# Altium PCB sband.PcbDoc (part 2 of 2)
Units mil, origin at the board's own origin, x right, y up, seen from the top; angles counter-clockwise.
Board outline 1830 x 2835 mil, 4 copper layers (Top Layer, Int1 (GND), Int2 (PWR), Bottom Layer), stack 53.912 mil thick; 48 components, 82 nets, 253 pads, 143 vias.
Unrouted connection lines stored in the file: 6.
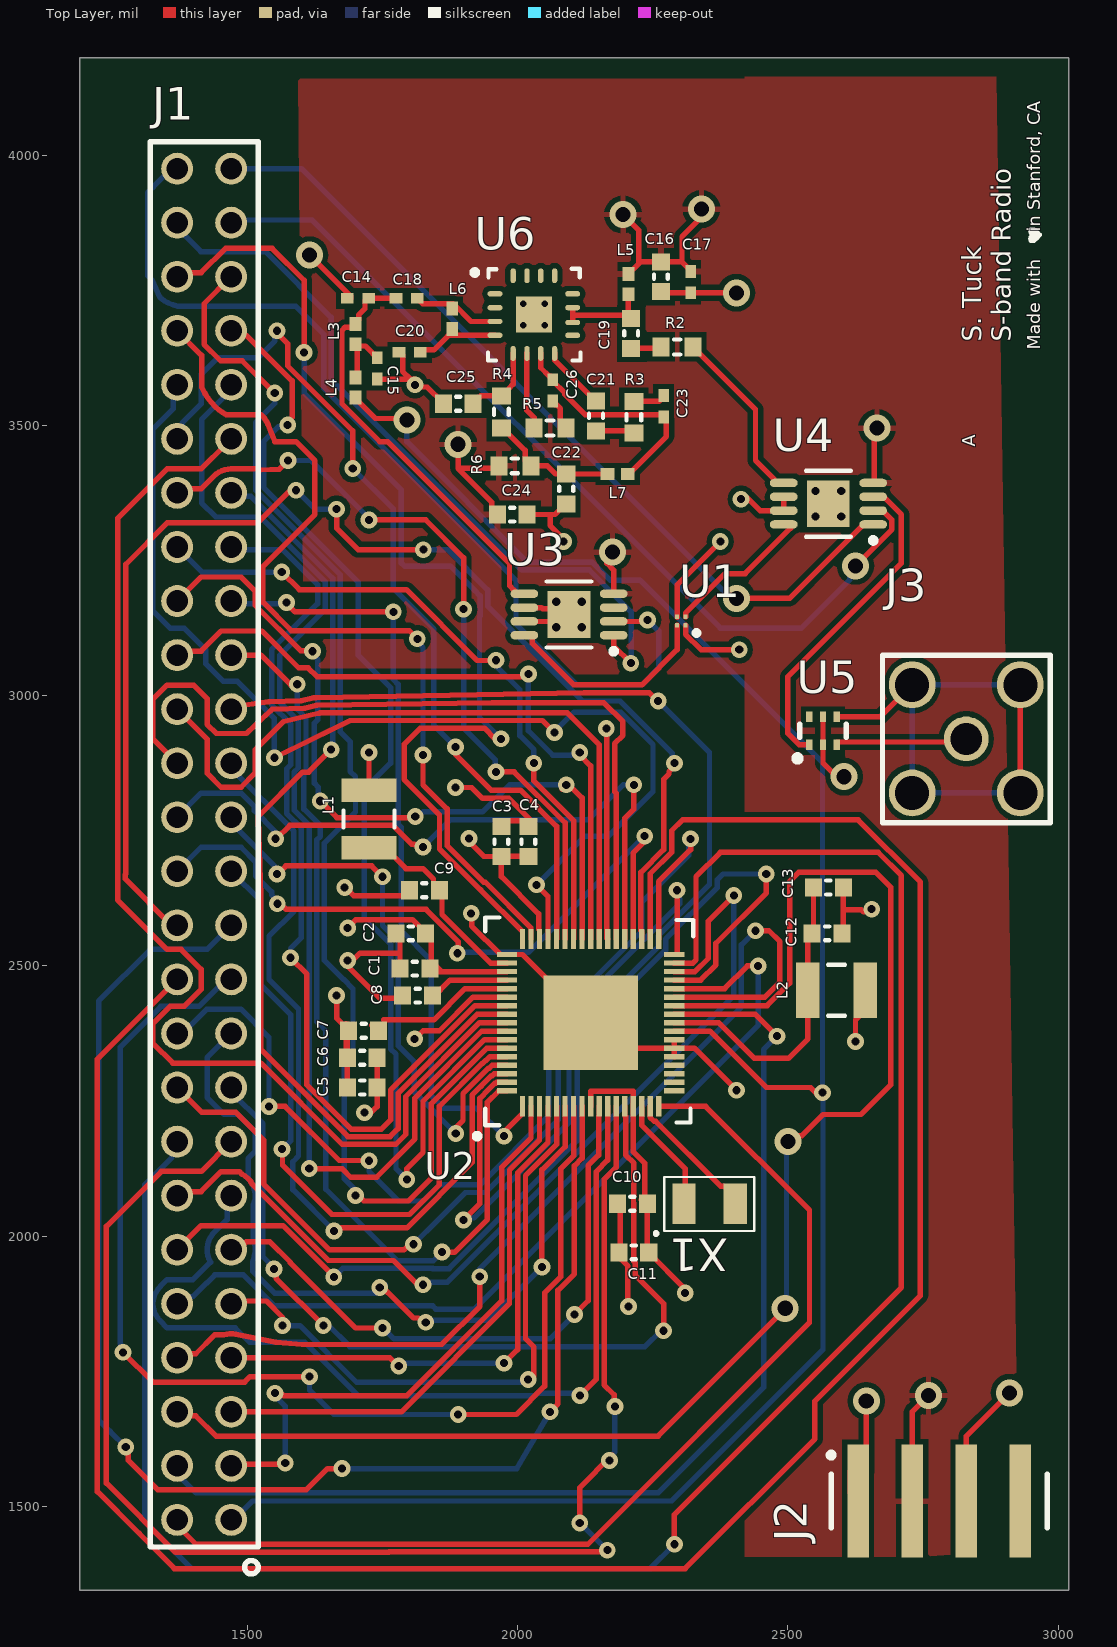
[diagram p0: Top Layer view]

## Via types
v1: diameter 31, hole 15, Top Layer to Bottom Layer, 114 vias
v2: diameter 50, hole 28, Top Layer to Bottom Layer, 16 vias
v3: diameter 30, hole 15.04, Top Layer to Bottom Layer, 8 vias
v4: diameter 24, hole 12, Top Layer to Bottom Layer, 4 vias
v5: diameter 31, hole 16, Top Layer to Bottom Layer, 1 vias

## Nets (pads, with @x,y where several pads share a name; then routed paths per layer and width w, separated by ;. In a path a pad name is that pad's centre, name@x,y a point inside that pad or via, vN(x,y) a via of type N, cw(c..) or ccw(c..) an arc to the next point about the centre after c; other vN are vias at no path point) (continued)
PF8: (continued)
  Top Layer w10: v1(1745,1905) 1750.68,1905 1759.16,1896.52 1759.65,1896.52 1807.65,1848.52 1816.3,1848.52 1824.32,1840.5 v1(1830,1840.5) ; v1(2045,1943.13) 2045,2122.67 2087.76,2165.43 U2.6
  Bottom Layer w10: J1.19 1425.5,2330.5 1425.5,2256.57 1457.07,2225 1482.93,2225 1514.5,2193.43 1514.5,2156.52 1501.41,2143.43 1501.41,2106.52 cw(c1470,2075) 1511,2057.7 1511,1992.3 cw(c1470,1975) 1513.03,1963.67 1510,1952.07 1510,1935 1551,1894 1739,1894 v1@1755,1910 ; v1(1830,1840.5) 1834,1844.5 1946.37,1844.5 v1(2045,1943.13)
PF9: J1.21 U2.7 | length 2238.5
  Top Layer w10: v1@1265,1785 v1(1270,1785) 1325,1730 1495,1730 1505,1740 v1(1615,1740) ; v1(1890,1670) 1997.63,1670 2050,1722.37 2050,1895 2080,1925 2080,2124.8 2103.5,2148.3 U2.7
  Bottom Layer w10: v1@1265.98,1785.98 1265.98,1800.38 1265,1801.36 1265,2350 1340,2425 1410.2,2425 1460.2,2475 J1.21 ; v1(1615,1740) 1615,1715 1660,1670 v1(1890,1670)
PF10: J1.23 U2.8 | length 2647.5
  Top Layer w10: v1@1280,1615 1280,1585 1334.5,1530.5 1608.71,1530.5 1648.21,1570 v1(1675,1570) ; v1(2060,1675) 2074.5,1689.5 2074.5,1899.7 2105,1930.2 2105,2130 2119.25,2144.25 U2.8
  Bottom Layer w10: v1(1275,1610) 1245.98,1639.02 1225,1660 1225,2435 1320.5,2530.5 1425.5,2530.5 J1.23 ; v1(1675,1570) 1998.24,1570 v1(2060,1675)
RESETn: J1.2 U2.17 | length 1935.3
  Top Layer w10: J1.2@1360,1475 1405,1430 2130,1430 2540,1840 2540,2048 2348,2240 2260.98,2240 U2.17
SW_LNA: J1.52 U3.2 | length 1760.2
  Top Layer w10: U3.2 2237.7,3137.2 v1(2240.5,3140)
  Bottom Layer w10: J1.52@1360,3975 1325.82,3940.82 1315.5,3930.5 1315.5,3776.82 1324.49,3767.83 1337.63,3738.27 1338.64,3735.99 ccw(c1386.99,3795.83) 1371.21,3720.53 1589.47,3720.53 1641.12,3668.88 1641.12,3568.88 1955,3255 1996.98,3213.02 1996.98,3132.82 2109.8,3020 2230,3020 2260.82,3050.82 2260.82,3119.68 v1(2240.5,3140)
SW_LNA2: J1.51 U4.1 | length 1583.6
  Top Layer w10: v2(2405,3180) 2503.35,3180 2639.96,3316.61 U4.1
  Bottom Layer w10: J1.51@1460,3975 1600,3975 2395,3180 v2(2405,3180)
SW_PA: J1.50 U3.1 | length 1375.3
  Top Layer w10: U3.1 2177.68,3091.82 v1(2209.5,3060)
  Bottom Layer w10: J1.50@1360.27,3875 1413.86,3821.41 1533.59,3821.41 1655.12,3699.88 1655.12,3584.88 2007.5,3232.5 2132.5,3232.5 2210,3155 2210,3060.5 v1(2209.5,3060)
SW_PA2: J1.49 U4.2 | length 1674.3
  Top Layer w10: v2(2625,3240) 2692.27,3307.27 2692.27,3325.33 2675.39,3342.2 U4.2
  Bottom Layer w10: J1.49@1465,3880 1620,3880 2375,3125 2525,3125 2614.22,3214.22 2614.22,3218.39 v2@2625.82,3230
TRANS_OUT: U3.3
pads on no net: J2.4 U2.18 U2.19 U2.20 U2.21 U5.6 U6.1 U6.2 U6.9 U6.12 U6.13 U6.14 U6.15 U6.16 U6.17
copper on no net:
  other v4: 2010,3685 2050,3685 2010,3725 2050,3725

## Polygon pours and split planes (outlines as drawn)
+5V on Top Layer "+5V_L01_P004" (solid, remove dead copper, pour order 4): 2740,1407 2927.36,1416.93 2885.38,4145 2420,4145 2420,3040 2420,1407
+5V on Top Layer "+5V_L01_P002" (solid, pour order 2): 1594.22,4140.78 2830,4140.78 2830,3265 2605,3040 1604.9,3040
GND on Bottom Layer "GND_L04_P003" (solid, remove dead copper, pour order 3): 1210,4160 2990,4160 3000,4150 3000,1365 1250,1365 1220,1395
GND on Int1 (GND) (split plane): 2999.9,1365.1 1210.1,1365.1 1210.1,4159.9 2999.9,4159.9
IOVDD on Int2 (PWR) (split plane): 2999.9,1365.1 1210.1,1365.1 1210.1,4159.9 2999.9,4159.9

## Other copper
Top Layer:
  region: 1662.32,3077.2

## Silkscreen, mask and mechanical layers (free items; w line width, h text height)
Top Overlay:
  lines w0.5: 2945.81,3844.17 2945.81,3846.17 ; 2945.81,3858.67 2945.81,3860.17 ; 2946.31,3841.17 2946.31,3848.67 ; 2946.31,3855.67 2946.31,3863.17 ; 2946.81,3840.67 2946.81,3849.67 ; 2946.81,3855.17 2946.81,3863.67 ; 2947.31,3840.67 2947.31,3849.67 ; 2947.31,3854.17 2947.31,3864.17 ; 2947.81,3839.17 2947.81,3851.17 ; 2947.81,3853.17 2947.81,3864.67 ; 2948.31,3839.17 2948.31,3851.17 ; 2948.31,3852.67 2948.31,3865.17 ; 2948.81,3839.17 2948.81,3851.67 ; 2948.81,3852.67 2948.81,3865.67 ; 2949.31,3838.17 2949.31,3866.17 ; 2949.81,3838.17 2949.81,3866.17 ; 2950.31,3838.17 2950.31,3866.17 ; 2950.81,3837.67 2950.81,3866.17 ; 2951.31,3837.67 2951.31,3866.17 ; 2951.81,3837.67 2951.81,3866.67 ; 2952.31,3837.67 2952.31,3866.67 ; 2952.81,3837.67 2952.81,3866.67 ; 2953.31,3837.67 2953.31,3866.67 ; 2953.81,3837.67 2953.81,3866.67 ; 2954.31,3837.67 2954.31,3866.67 ; 2954.81,3837.67 2954.81,3866.17 ; 2955.31,3837.67 2955.31,3866.17 ; 2955.81,3838.17 2955.81,3866.17 ; 2956.31,3838.17 2956.31,3866.17 ; 2956.81,3839.17 2956.81,3865.67 ; 2957.31,3839.17 2957.31,3865.67 ; 2957.81,3839.17 2957.81,3865.17 ; 2958.31,3839.67 2958.31,3864.67 ; 2958.81,3840.17 2958.81,3864.67 ; 2959.31,3840.17 2959.31,3864.67 ; 2959.81,3840.67 2959.81,3863.17 ; 2960.31,3841.17 2960.31,3863.17 ; 2960.81,3841.67 2960.81,3863.17 ; 2961.31,3842.17 2961.31,3861.67 ; 2961.81,3842.67 2961.81,3861.67 ; 2962.31,3843.17 2962.31,3861.67 ; 2962.81,3843.67 2962.81,3860.17 ; 2963.31,3844.17 2963.31,3860.17 ; 2963.81,3844.67 2963.81,3860.17 ; 2964.31,3845.67 2964.31,3858.67 ; 2964.81,3845.67 2964.81,3858.67 ; 2965.31,3846.67 2965.31,3858.17 ; 2965.81,3847.17 2965.81,3857.17 ; 2966.31,3847.67 2966.31,3857.17 ; 2966.81,3848.17 2966.81,3856.67 ; 2967.31,3848.67 2967.31,3855.67 ; 2967.81,3849.17 2967.81,3855.67 ; 2968.31,3849.67 2968.31,3855.17 ; 2968.81,3850.17 2968.81,3854.17 ; 2969.31,3850.67 2969.31,3854.17 ; 2969.81,3851.17 2969.81,3853.67
  text "S. Tuck" at 2869.36,3655 h60 r90
  text "S-band Radio" at 2924.36,3655 h60 r90
  text "Made with     in Stanford, CA" at 2975,3640 h40 r90
  text "A" at 2855,3460 h40 r90